# Altium PCB retroBreadboard_v1i1.PcbDoc
Units mm, origin at the board's own origin, x right, y up, seen from the top; angles counter-clockwise.
Board outline 63.5 x 58.42 mm, 4 copper layers (Component Side, Ground Plane, Power Plane, Solder Side), stack 0.844 mm thick; 80 components, 77 nets, 301 pads, 74 vias.
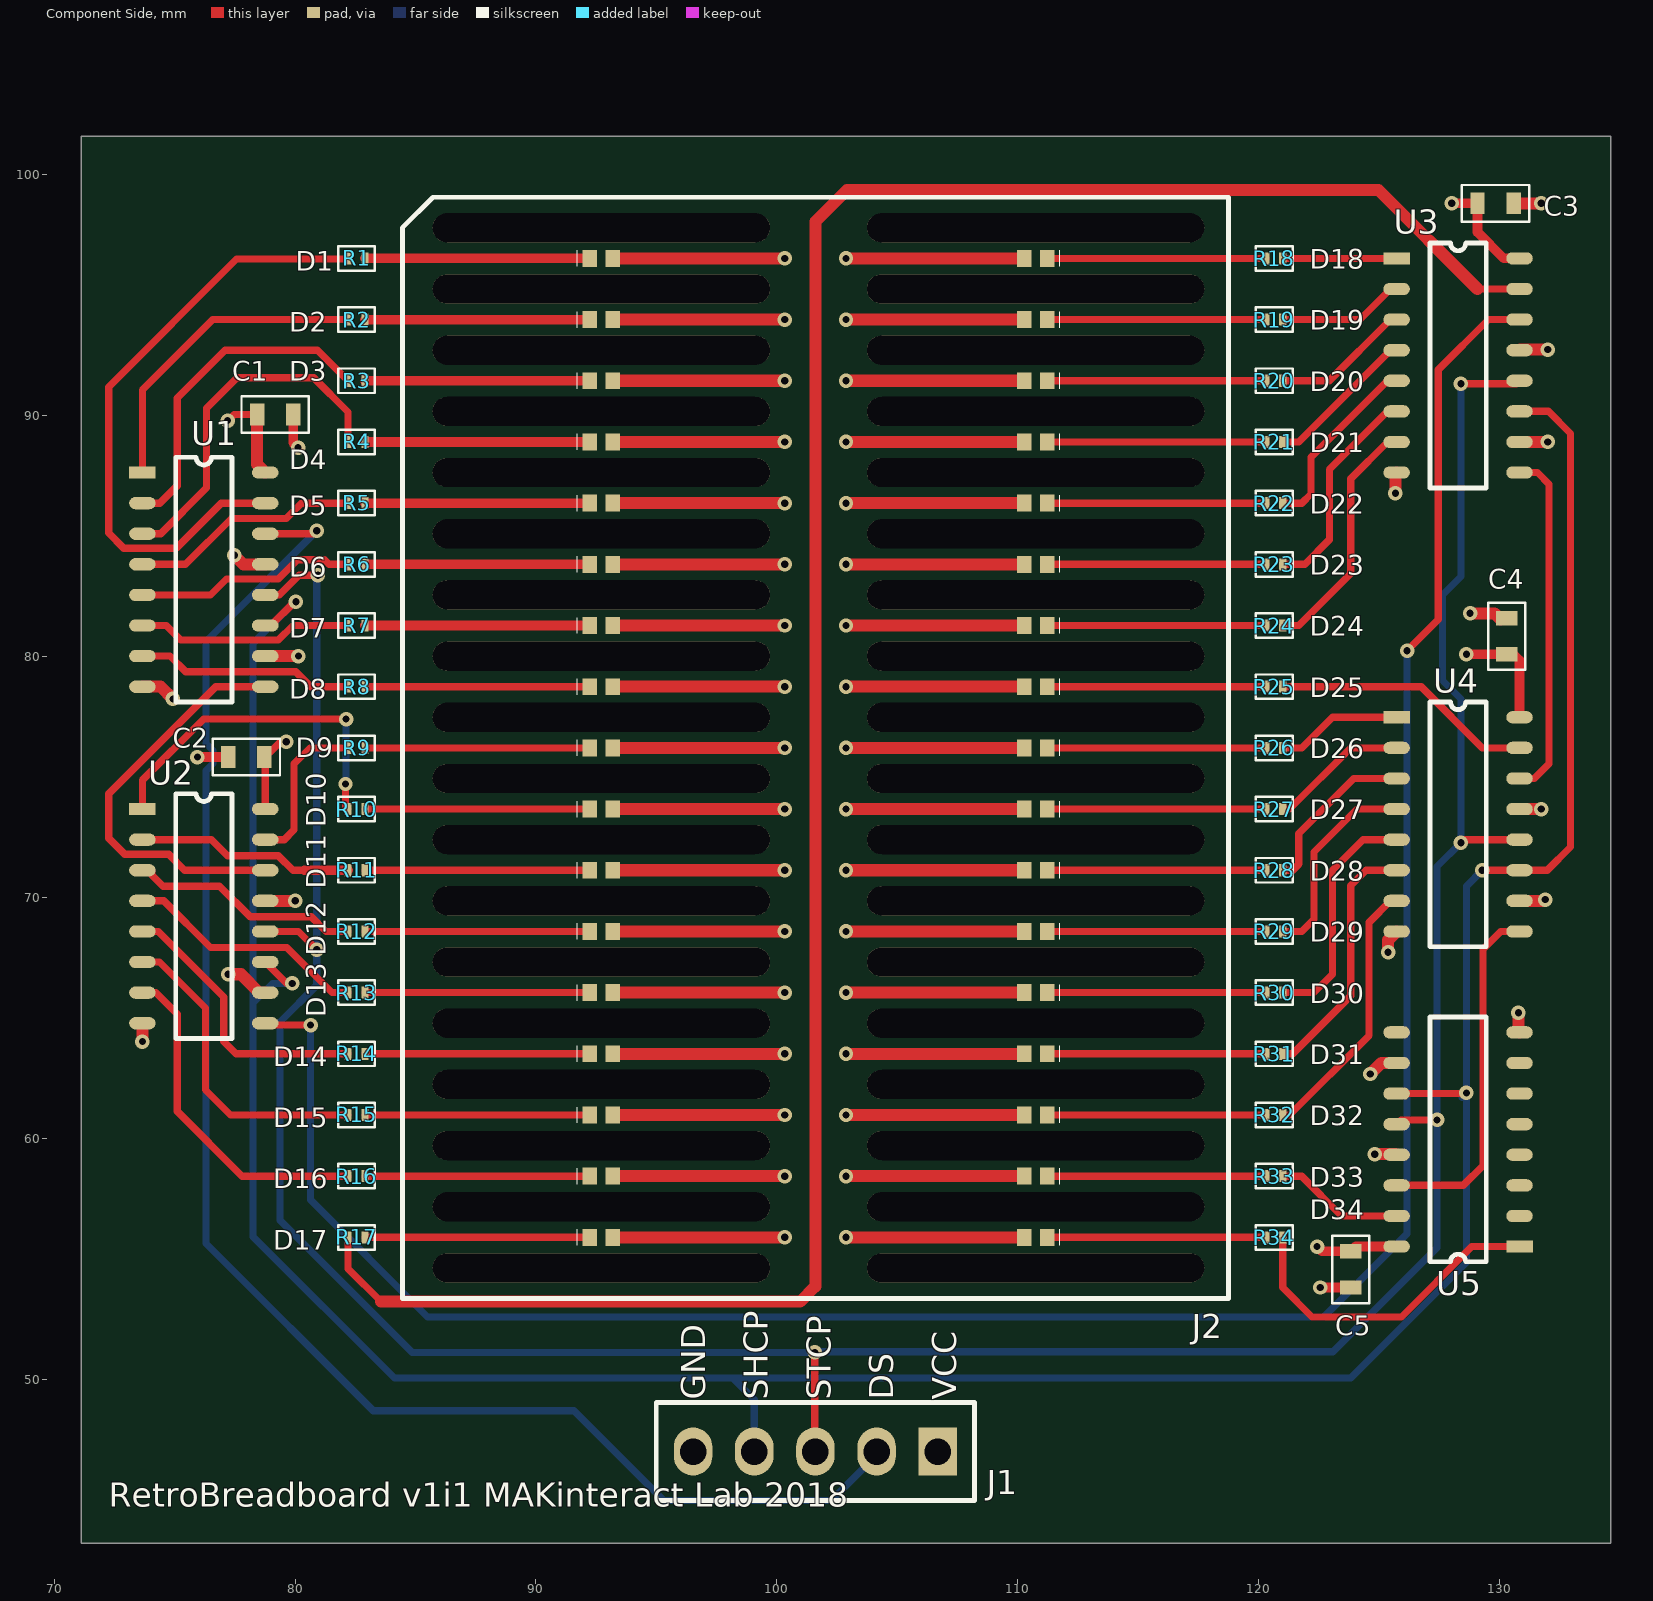
[diagram p0: Component Side view]
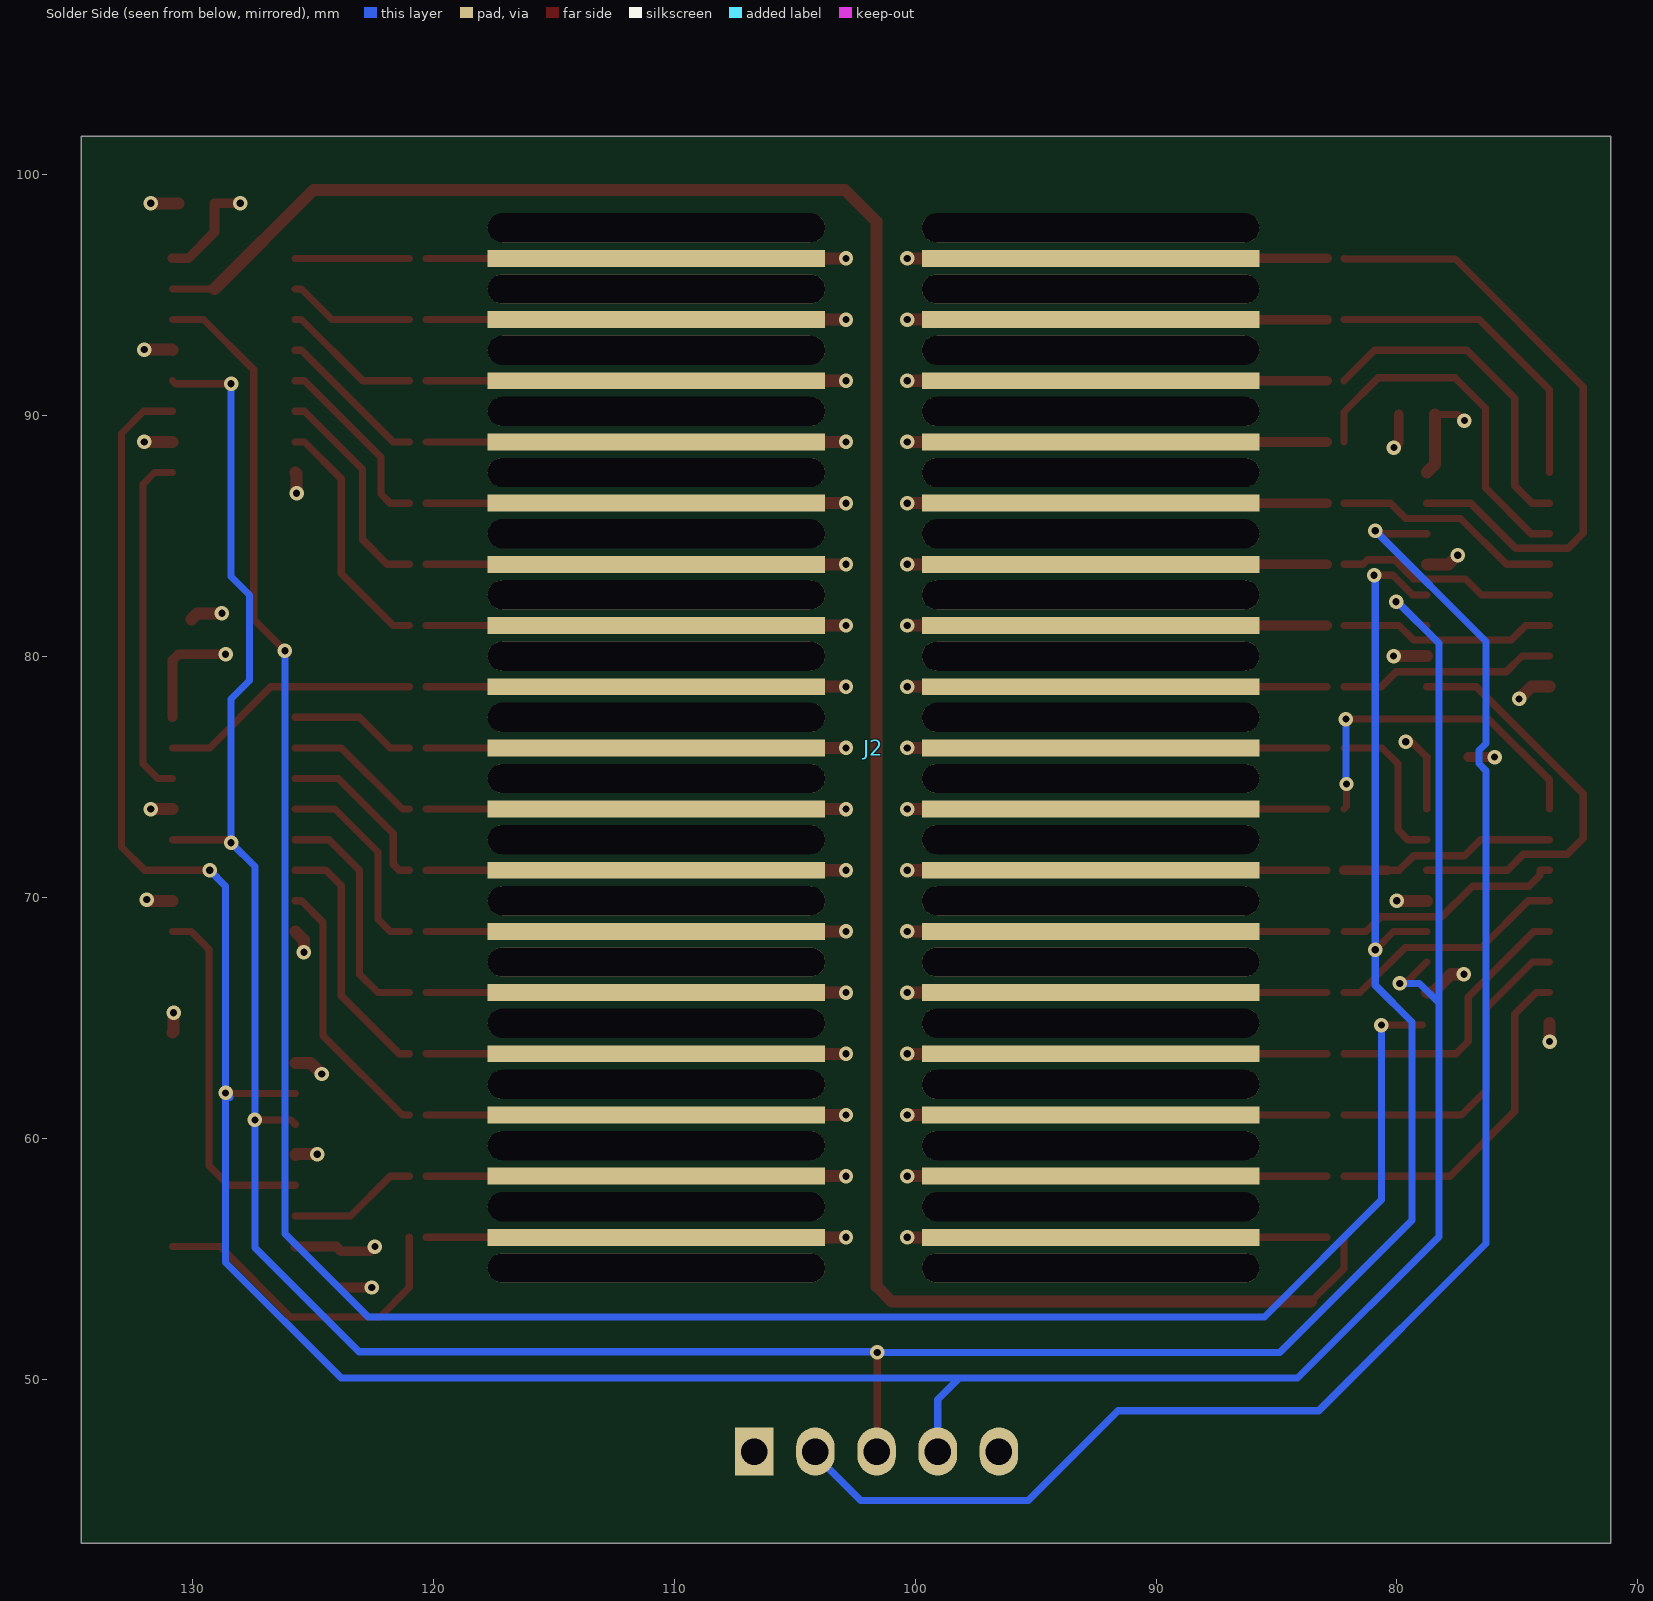
[diagram p1: Solder Side view, seen from below]
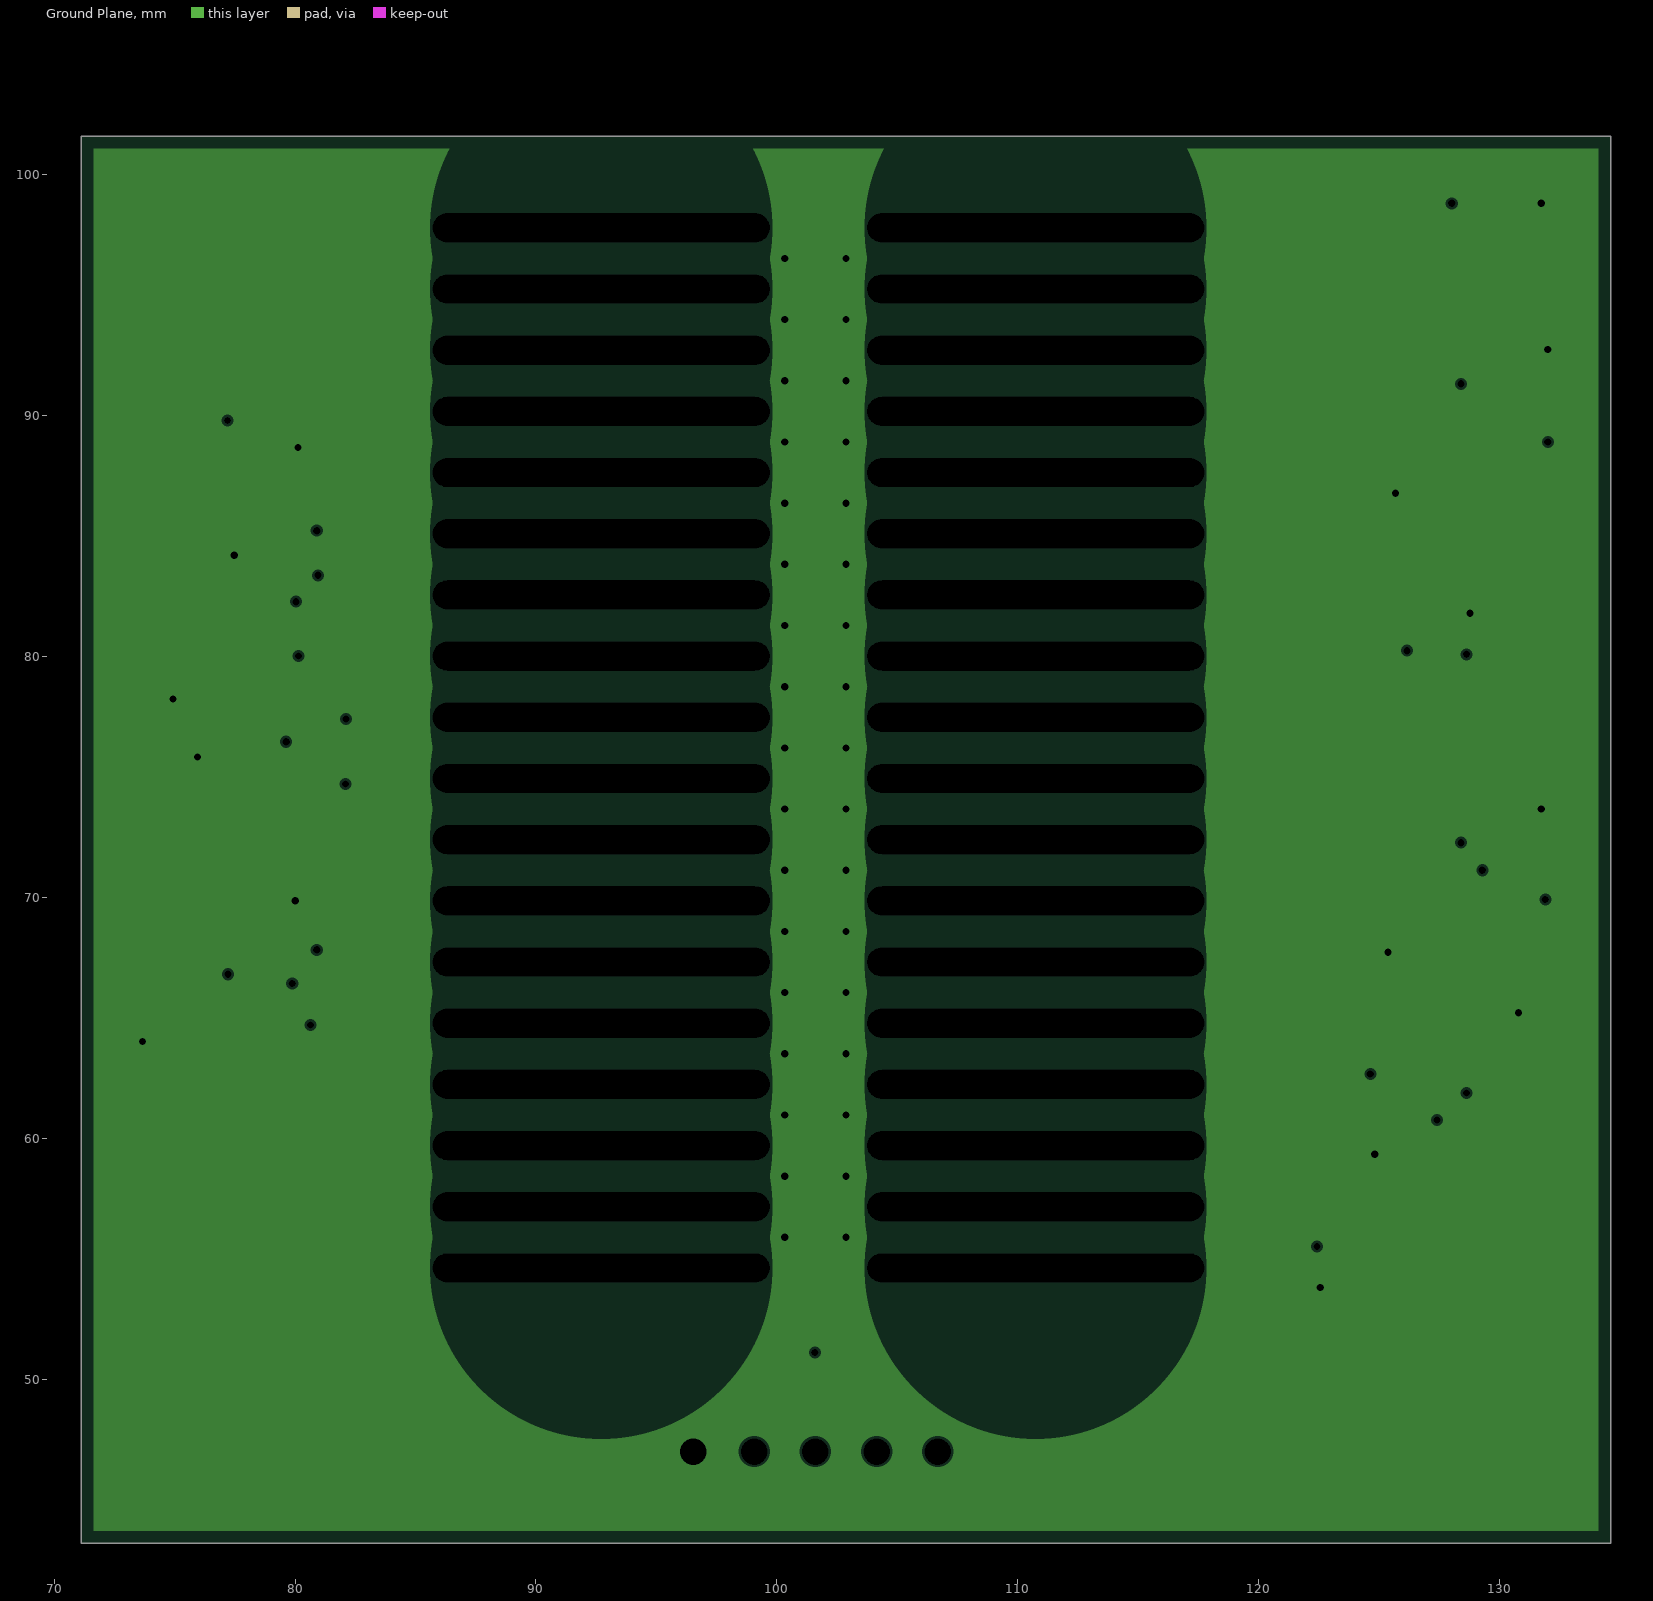
[diagram p2: Ground Plane, clearances drawn from the general rule]
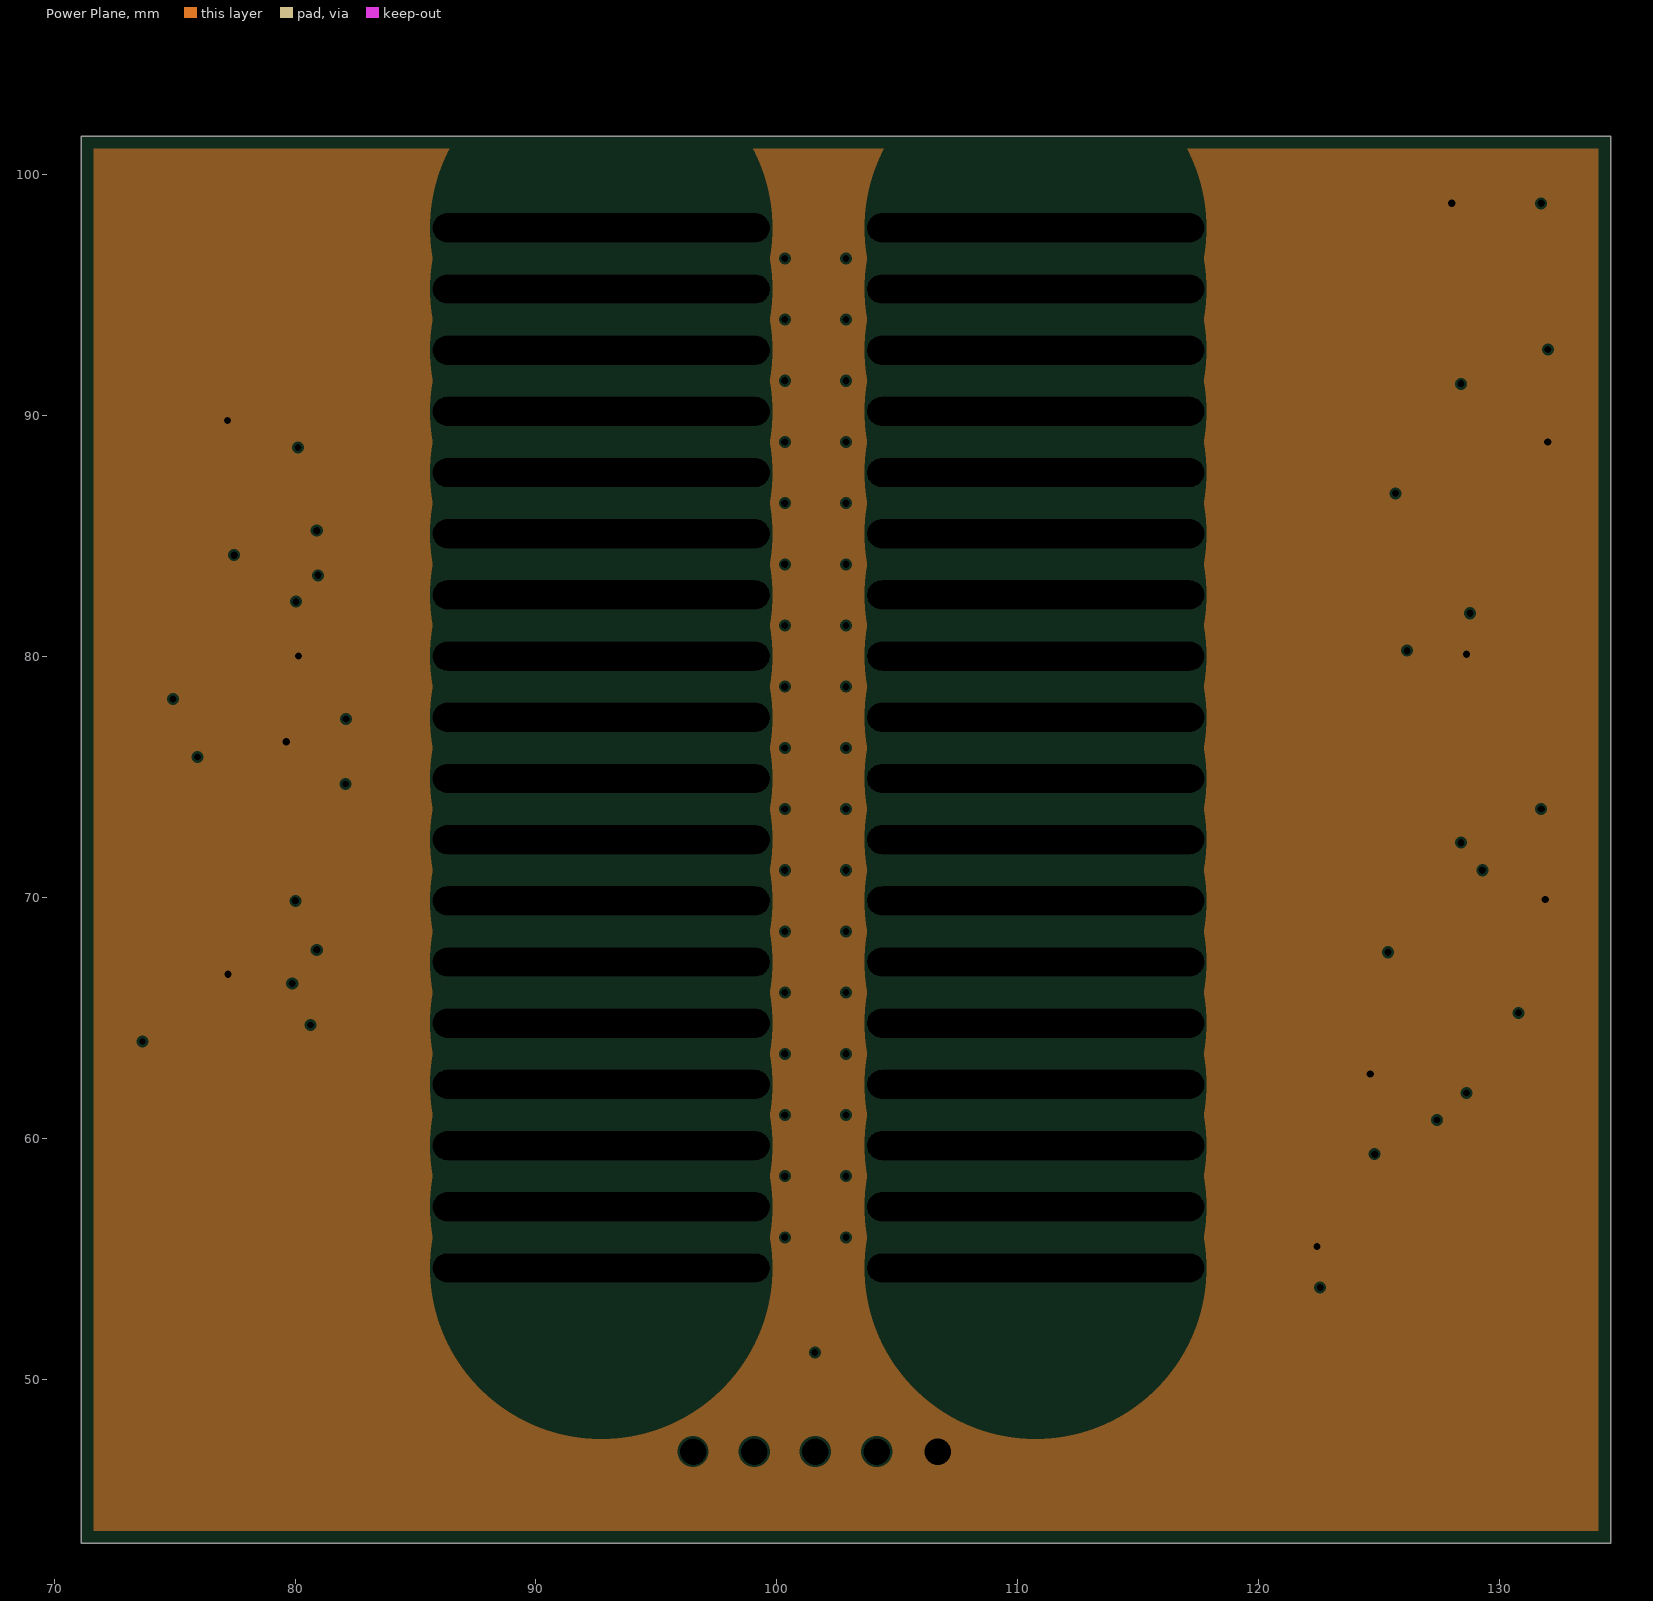
[diagram p3: Power Plane, clearances drawn from the general rule]
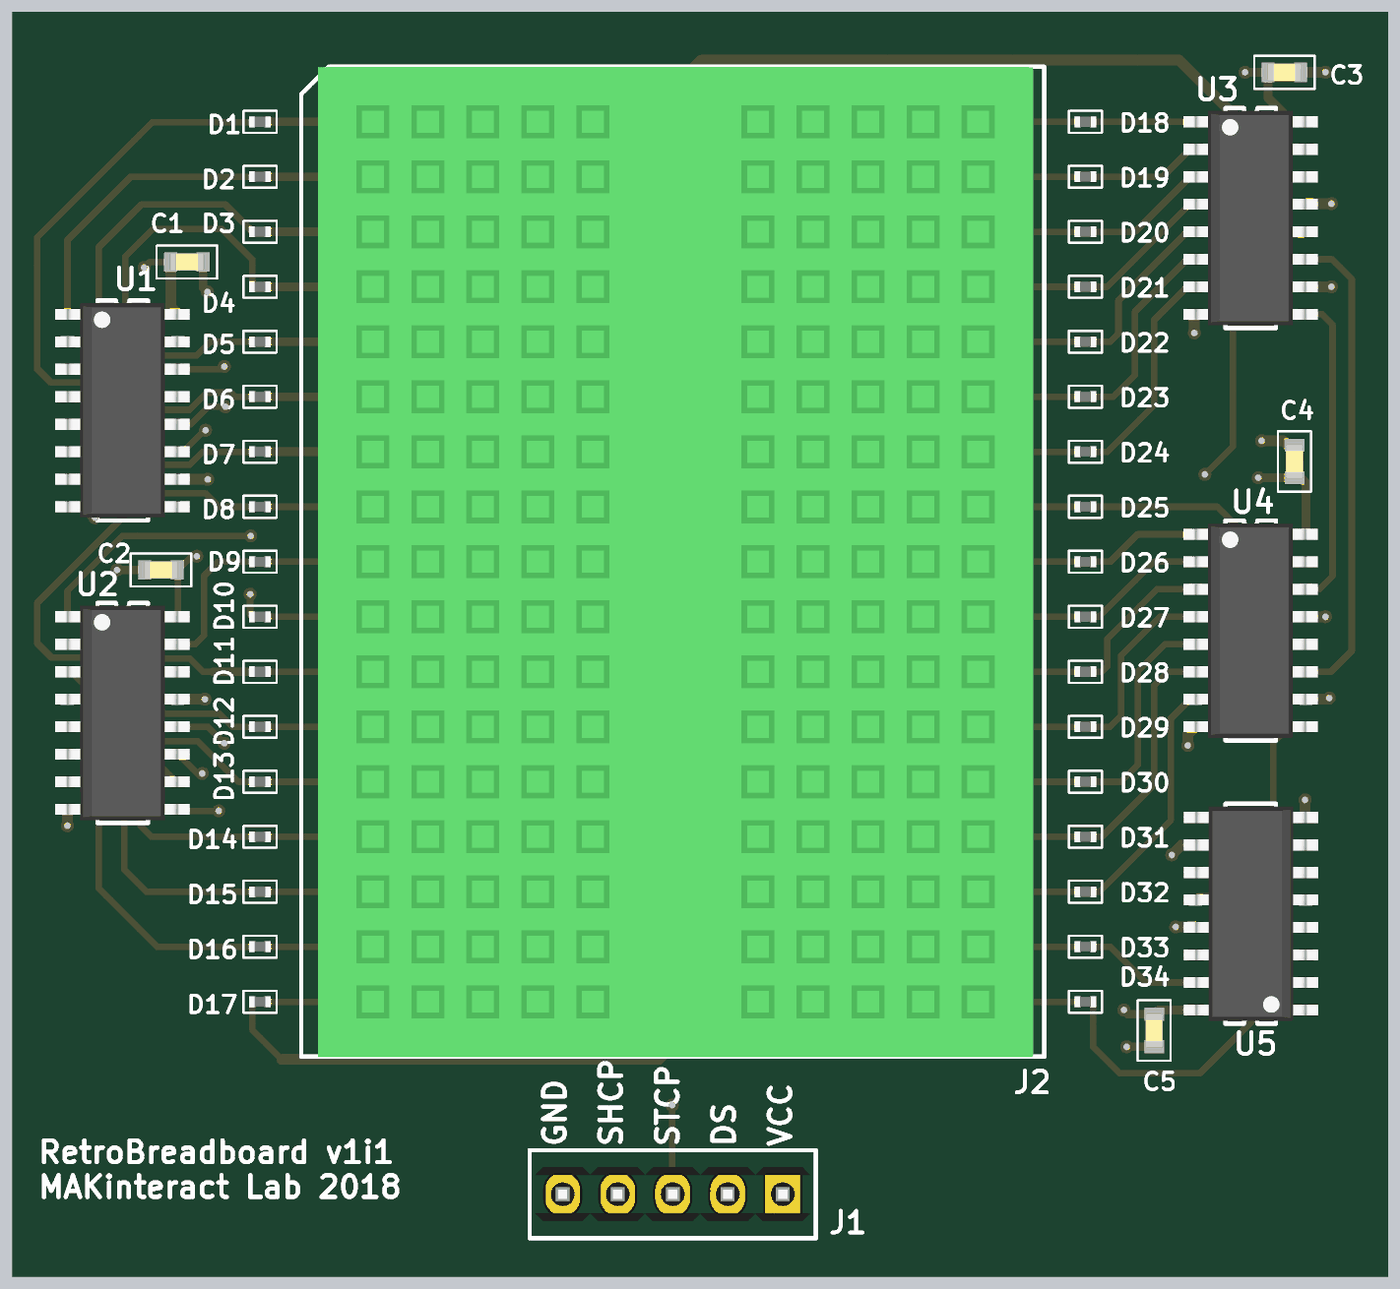
[diagram p4: 3D render of the assembled board from above, using the file's embedded part models]

## Layer stack, top to bottom
Top Solder: solder mask 0.0102, Solder Resist, Dk 3.5
Component Side: signal copper 0.0356
Dielectric 1: core 0.32, FR-4, Dk 4.8
Ground Plane: plane copper 0.036, net GND
Dielectric 3: prepreg 0.127, Dk 4.2
Power Plane: plane copper 0.036, net VCC
Dielectric 4: core 0.254, Dk 4.2
Solder Side: signal copper 0.0356
Bottom Solder: solder mask 0.0102, Solder Resist, Dk 3.5

## Board outline
71.12,101.6 134.62,101.6 134.62,43.18 71.12,43.18

## Design rules (kind name [scope] priority, off if disabled: settings)
Clearance "Around polygon" [IsRegion] p1: gap=0.3 ignorepadtopadclearanceinfootprint=FALSE
Clearance [All] p2: gap=0.2 ignorepadtopadclearanceinfootprint=FALSE
ComponentClearance [All] p1: gap=0.2 collisioncheckmode=3 verticalgap=0.2 showdistances=FALSE
HoleSize [All] p1: absolutevalues=TRUE maxlimit=14 minlimit=0.2 maxpercent=80.000 minpercent=20.000
HoleToHoleClearance [All] p1: gap=0.305 allowstackedmicrovias=TRUE
MinimumSolderMaskSliver [All] p1: minsoldermaskwidth=0.02
PlaneClearance [All] p1: clearance=0.1
PlaneConnect [All] p1: planeconnectstyle=Direct reliefexpansion=0.508 reliefentries=4 reliefconductorwidth=0.254 reliefairgap=0.254
PolygonConnect [All] p1: connectstyle=Direct reliefconductorwidth=0.254 reliefentries=4 polygonreliefangle="90 Angle" airgapwidth=0.254
RoutingVias [All] p1: holewidth=0.3 width=0.6 viastyle="Through Hole" minholewidth=0.3 minwidth=0.6 maxholewidth=0.3 maxwidth=0.6
SilkToSilkClearance [All] p1: silktosilkclearance=0.1
SilkToSolderMaskClearance [IsPad] p1: minsilkscreentomaskgap=0.1 clearancetoexposedcopper=TRUE
SolderMaskExpansion [All] p1: expansion=0.1
Width Width_POWER [InNet ('+*') or InNet('GND')] p1: maxlimit=3 minlimit=0.4 preferedwidth=0.4
Width [All] p2: maxlimit=0.5 minlimit=0.3 preferedwidth=0.4
22 further rules are at their usual default settings.

## Components (designator, comment, footprint, x,y, rotation, side; value= is the part's Value field where it differs from the comment)
C1 "10u" C1608 79.172,90.043 r0 top
C2 "10u" C1608 77.978,75.819 r180 top
C3 "10u" C1608 129.835,98.806 r0 top
C4 "10u" C1608 130.302,80.833 r90 top
C5 "10u" C1608 123.825,54.549 r270 top
D1 "VLMB1500-GS08" VLMB1500-GS08 92.71,96.52 r0 top
D2 "VLMB1500-GS08" VLMB1500-GS08 92.71,93.98 r0 top
D3 "VLMB1500-GS08" VLMB1500-GS08 92.71,91.44 r0 top
D4 "VLMB1500-GS08" VLMB1500-GS08 92.71,88.9 r0 top
D5 "VLMB1500-GS08" VLMB1500-GS08 92.71,86.36 r0 top
D6 "VLMB1500-GS08" VLMB1500-GS08 92.71,83.82 r0 top
D7 "VLMB1500-GS08" VLMB1500-GS08 92.71,81.28 r0 top
D8 "VLMB1500-GS08" VLMB1500-GS08 92.71,78.74 r0 top
D9 "VLMB1500-GS08" VLMB1500-GS08 92.71,76.2 r0 top
D10 "VLMB1500-GS08" VLMB1500-GS08 92.71,73.66 r0 top
D11 "VLMB1500-GS08" VLMB1500-GS08 92.71,71.12 r0 top
D12 "VLMB1500-GS08" VLMB1500-GS08 92.71,68.58 r0 top
D13 "VLMB1500-GS08" VLMB1500-GS08 92.71,66.04 r0 top
D14 "VLMB1500-GS08" VLMB1500-GS08 92.71,63.5 r0 top
D15 "VLMB1500-GS08" VLMB1500-GS08 92.71,60.96 r0 top
D16 "VLMB1500-GS08" VLMB1500-GS08 92.71,58.42 r0 top
D17 "VLMB1500-GS08" VLMB1500-GS08 92.71,55.88 r0 top
D18 "VLMB1500-GS08" VLMB1500-GS08 110.744,96.52 r180 top
D19 "VLMB1500-GS08" VLMB1500-GS08 110.744,93.98 r180 top
D20 "VLMB1500-GS08" VLMB1500-GS08 110.744,91.44 r180 top
D21 "VLMB1500-GS08" VLMB1500-GS08 110.744,88.9 r180 top
D22 "VLMB1500-GS08" VLMB1500-GS08 110.744,86.36 r180 top
D23 "VLMB1500-GS08" VLMB1500-GS08 110.744,83.82 r180 top
D24 "VLMB1500-GS08" VLMB1500-GS08 110.744,81.28 r180 top
D25 "VLMB1500-GS08" VLMB1500-GS08 110.744,78.74 r180 top
D26 "VLMB1500-GS08" VLMB1500-GS08 110.744,76.2 r180 top
D27 "VLMB1500-GS08" VLMB1500-GS08 110.744,73.66 r180 top
D28 "VLMB1500-GS08" VLMB1500-GS08 110.744,71.12 r180 top
D29 "VLMB1500-GS08" VLMB1500-GS08 110.744,68.58 r180 top
D30 "VLMB1500-GS08" VLMB1500-GS08 110.744,66.04 r180 top
D31 "VLMB1500-GS08" VLMB1500-GS08 110.744,63.5 r180 top
D32 "VLMB1500-GS08" VLMB1500-GS08 110.744,60.96 r180 top
D33 "VLMB1500-GS08" VLMB1500-GS08 110.744,58.42 r180 top
D34 "VLMB1500-GS08" VLMB1500-GS08 110.744,55.88 r180 top
J1 "H1x5_254" HEADER_1X5_254 106.68,46.99 r270 top
J2 "MiniBreadbaord" MINI_BREADBOARD 101.6,78.74 r0 top locked
R1 "RR0510P-101-D" RES0402 82.55,96.52 r180 top
R2 "RR0510P-101-D" RES0402 82.55,93.98 r180 top
R3 "RR0510P-101-D" RES0402 82.55,91.44 r180 top
R4 "RR0510P-101-D" RES0402 82.55,88.9 r180 top
R5 "RR0510P-101-D" RES0402 82.55,86.36 r180 top
R6 "RR0510P-101-D" RES0402 82.55,83.82 r180 top
R7 "RR0510P-101-D" RES0402 82.55,81.28 r180 top
R8 "RR0510P-101-D" RES0402 82.55,78.74 r180 top
R9 "RR0510P-101-D" RES0402 82.55,76.2 r180 top
R10 "RR0510P-101-D" RES0402 82.55,73.66 r180 top
R11 "RR0510P-101-D" RES0402 82.55,71.12 r180 top
R12 "RR0510P-101-D" RES0402 82.55,68.58 r180 top
R13 "RR0510P-101-D" RES0402 82.55,66.04 r180 top
R14 "RR0510P-101-D" RES0402 82.55,63.5 r180 top
R15 "RR0510P-101-D" RES0402 82.55,60.96 r180 top
R16 "RR0510P-101-D" RES0402 82.55,58.42 r180 top
R17 "RR0510P-101-D" RES0402 82.55,55.88 r180 top
R18 "RR0510P-101-D" RES0402 120.65,96.52 r0 top
R19 "RR0510P-101-D" RES0402 120.65,93.98 r0 top
R20 "RR0510P-101-D" RES0402 120.65,91.44 r0 top
R21 "RR0510P-101-D" RES0402 120.65,88.9 r0 top
R22 "RR0510P-101-D" RES0402 120.65,86.36 r0 top
R23 "RR0510P-101-D" RES0402 120.65,83.82 r0 top
R24 "RR0510P-101-D" RES0402 120.65,81.28 r0 top
R25 "RR0510P-101-D" RES0402 120.65,78.74 r0 top
R26 "RR0510P-101-D" RES0402 120.65,76.2 r0 top
R27 "RR0510P-101-D" RES0402 120.65,73.66 r0 top
R28 "RR0510P-101-D" RES0402 120.65,71.12 r0 top
R29 "RR0510P-101-D" RES0402 120.65,68.58 r0 top
R30 "RR0510P-101-D" RES0402 120.65,66.04 r0 top
R31 "RR0510P-101-D" RES0402 120.65,63.5 r0 top
R32 "RR0510P-101-D" RES0402 120.65,60.96 r0 top
R33 "RR0510P-101-D" RES0402 120.65,58.42 r0 top
R34 "RR0510P-101-D" RES0402 120.65,55.88 r0 top
U1 "SN74HC595DR" SOIC16 73.66,87.63 r0 top
U2 "SN74HC595DR" SOIC16 73.66,73.66 r0 top
U3 "SN74HC595DR" SOIC16 125.73,96.52 r0 top
U4 "SN74HC595DR" SOIC16 125.73,77.47 r0 top
U5 "SN74HC595DR" SOIC16 130.83,55.499 r180 top

## Footprints (in the part's own frame and the unit in brackets; to place one, negate y for a bottom-side part, rotate by r counter-clockwise, add the part's x,y. Pads: shape width x height; smd on the part's side, far side on the other; paste and mask are expansions set on the pad)
C1608 [mm]
  rect 0.6x0.9 smd mask+0.02: 1(-0.75,0) 2(0.75,0)
  silkscreen extent -1.4,-0.76 1.4,0.76, body extent -0.8,-0.41 0.8,0.41, height 0.57
HEADER_1X5_254 [mm]
  rect 2x1.6 hole 1.1: 1(0,0)
  oval 2x1.6 hole 1.1: 2(0,-2.54) 3(0,-5.08) 4(0,-7.62) 5(0,-10.16)
  silkscreen extent -2.03,-11.68 2.03,1.52, body extent -1.25,-11.43 1.25,1.27, height 3.1
MINI_BREADBOARD [mm]
  rect 14x0.7 smd far side mask+0.05: 1(-8.89,17.78) 2(-8.89,15.24) 3(-8.89,12.7) 4(-8.89,10.16) 5(-8.89,7.62) 6(-8.89,5.08) 7(-8.89,2.54) 8(-8.89,0) 9(-8.89,-2.54) 10(-8.89,-5.08) 11(-8.89,-7.62) 12(-8.89,-10.16) 13(-8.89,-12.7) 14(-8.89,-15.24) 15(-8.89,-17.78) 16(-8.89,-20.32) 17(-8.89,-22.86) 18(9.144,17.78) 19(9.144,15.24) 20(9.144,12.7) 21(9.144,10.16) 22(9.144,7.62) 23(9.144,5.08) 24(9.144,2.54) 25(9.144,0) 26(9.144,-2.54) 27(9.144,-5.08) 28(9.144,-7.62) 29(9.144,-10.16) 30(9.144,-12.7) 31(9.144,-15.24) 32(9.144,-17.78) 33(9.144,-20.32) 34(9.144,-22.86)
  rrect100% 14x1.2 hole 1.2 slot 14 at 0 deg unplated: ""(-8.89,-24.13) ""(-8.89,-21.59) ""(-8.89,-19.05) ""(-8.89,-16.51) ""(-8.89,-13.97) ""(-8.89,-11.43) ""(-8.89,-8.89) ""(-8.89,-6.35) ""(-8.89,-3.81) ""(-8.89,-1.27) ""(-8.89,1.27) ""(-8.89,3.81) ""(-8.89,6.35) ""(-8.89,8.89) ""(-8.89,11.43) ""(-8.89,13.97) ""(-8.89,16.51) ""(-8.89,19.05) ""(9.144,-24.13) ""(9.144,-21.59) ""(9.144,-19.05) ""(9.144,-16.51) ""(9.144,-13.97) ""(9.144,-11.43) ""(9.144,-8.89) ""(9.144,-6.35) ""(9.144,-3.81) ""(9.144,-1.27) ""(9.144,1.27) ""(9.144,3.81) ""(9.144,6.35) ""(9.144,8.89) ""(9.144,11.43) ""(9.144,13.97) ""(9.144,16.51) ""(9.144,19.05)
  silkscreen extent -17.14,-25.4 17.15,20.32, body extent -16.38,-25.4 16.64,20.32, height 9.54
RES0402 [mm]
  rect 0.3x0.5 smd mask+0.02: 1(-0.35,0) 2(0.35,0)
  silkscreen extent -0.76,-0.51 0.76,0.51, body extent -0.5,-0.25 0.5,0.25, height 0.25
SOIC16 [mm]
  rect 1.1x0.51 smd mask+0.02: 1(0,0)
  oval 1.1x0.51 smd mask+0.02: 2(0,-1.27) 3(0,-2.54) 4(0,-3.81) 5(0,-5.08) 6(0,-6.35) 7(0,-7.62) 8(0,-8.89) 9(5.1,-8.89) 10(5.1,-7.62) 11(5.1,-6.35) 12(5.1,-5.08) 13(5.1,-3.81) 14(5.1,-2.54) 15(5.1,-1.27) 16(5.1,0)
  silkscreen extent 1.38,-9.53 3.72,0.64, body extent -0.56,-9.4 5.64,0.51, height 1.71
VLMB1500-GS08 [mm]
  rect 0.6x0.7 smd mask+0.02: 1(-0.475,0) 2(0.475,0)
  silkscreen extent -0.99,-0.33 -0.99,0.33, body extent -0.5,-0.25 0.51,0.25, height 0.45

## Part data
C1 C2 C3 C4 C5: library part C805_10u
D1 D2 D3 D4 D5 D6 D7 D8 D9 D10 D11 D12 D13 D14 D15 D16 D17 D18 D19 D20 D21 D22 D23 D24 D25 D26 D27 D28 D29 D30 D31 D32 D33 D34: "Standard LEDs - SMD 0402 BLUE Non-Diff", Case/Package=0402, Case Code (Metric)=1005, Colour=Blue, Forward Current=30mA, Forward Voltage=3.15V, Lens Colour=Clear, Manufacturer=Vishay, Max Operating Temperature=80°C, Max Power Dissipation=76mW, Min Operating Temperature=-30°C, Package Quantity=1, Power Rating=75mW, Supplier Part Number 1=VLMB1500-GS08DKR-ND, Test Current=5mA, Case Code (Imperial)=0402, ComponentLink1Description=http://www.vishay.com/docs/82554/vlmo1500.pdf, ComponentLink1URL=http://www.vishay.com/docs/82554/vlmo1500.pdf, Contact Plating=Matte,Tin, Depth=0.5mm, Dominant Wavelength=470nm, Height=0.35mm, Illumination Colour=Blue, Lead Free="Lead Free", Length=1mm, Lens Style=Rectangular, Luminous Intensity=45mcd, Manufacturer Part Number=VLMB1500-GS08, Mount="Surface Mount", Number of Elements=1, Number of LEDs=1, Number of Pins=2, Packaging="Tape and Reel", Power Dissipation=76mW, Pricing 1="1=0.41, 10=0.292, 25=0.2532, 100=0.1949, 250=0.15836, 500=0.11696, 1000=0.09746 (USD)", Radiation Hardening=No, REACH SVHC=Unknown, Stock 1=322508, Supplier 1=Digi-Key, Viewing Angle=130°, Width=0.5mm
J1: "CONN HEADER 5POS .100 VERT GOLD", Colour=White, Contact Resistance=10mR, Current Rating=4A, Flammability Rating="UL94 V-0", Insulation Resistance=50GR, Manufacturer=Molex, Manufacturer Part Number=22-10-2051, Max Operating Temperature=75°C, Min Operating Temperature=0°C, Package Quantity=10, Supplier Part Number 1=WM2725-ND, Voltage Rating=250V, ComponentLink1Description=http://www.mouser.com/ds/2/276/0022102051_PCB_HEADERS-158417.pdf, ComponentLink1URL=http://www.mouser.com/ds/2/276/0022102051_PCB_HEADERS-158417.pdf, ComponentLink2Description=http://www.jameco.com/Jameco/Products/ProdDS/878921.pdf, ComponentLink2URL=http://www.jameco.com/Jameco/Products/ProdDS/878921.pdf, ComponentLink3Description=https://www.molex.com/pdm_docs/ps/PS-10-07-001.pdf, ComponentLink3URL=https://www.molex.com/pdm_docs/ps/PS-10-07-001.pdf, Connector Type="Male Pin", Contact Gender=Male, Contact Material=Brass, Contact Mating Length=0.295inch, Contact Plating=Gold, Depth=6.35mm, Gender=Male, Glow Wire Compliant=Non-compliant, Halogen Free="Low Halogen", Height=10.67mm, Housing Colour=White, Housing Material=Nylon, Length=35.56mm, Max Current Rating=4A, Mount="Through Hole", Number of Circuits=5, Number of Contacts=5, Number of Positions=5, Number of Rows=1, Orientation=Straight, Packaging=Bulk, Pitch=2.54mm, Pricing 1="1=0.99, 10=0.867, 100=0.748, 500=0.612, 1000=0.544, 5000=0.476, 10000=0.4522 (USD)", Radiation Hardening=No, REACH SVHC="No SVHC", Stock 1=6544, Supplier 1=Digi-Key, Termination=Solder, Voltage Rating (DC)=250V
J2: library part 1738132-1, "Mini Breadboard", Colour=Natural, Manufacturer="TE Connectivity AMP", Supplier Part Number 1=1738132-1-ND, ComponentLink1Description=http://www.te.com/commerce/DocumentDelivery/DDEController?Action=srchrtrv&DocNm=1738132&DocType=Customer+Drawing&DocLang=English, ComponentLink1URL=http://www.te.com/commerce/DocumentDelivery/DDEController?Action=srchrtrv&DocNm=1738132&DocType=Customer+Drawing&DocLang=English, Gender=Male, Manufacturer Part Number=1738132-1, Stock 1=0, Supplier 1=Digi-Key
R1 R2 R3 R4 R5 R6 R7 R8 R9 R10 R11 R12 R13 R14 R15 R16 R17 R18 R19 R20 R21 R22 R23 R24 R25 R26 R27 R28 R29 R30 R31 R32 R33 R34: "RES SMD 100 OHM 0.5% 1/16W 0402", Case/Package=0402, Case Code (Metric)=1005, Manufacturer=Susumu, Max Operating Temperature=125°C, Max Power Dissipation=63mW, Min Operating Temperature=-55°C, Package Quantity=1, Resistance=100R, Supplier Part Number 1=RR05P100DDKR-ND, Temperature Coefficient=25ppm/°C, Tolerance=0.5%, Voltage Rating=25V, Case Code (Imperial)=0402, ComponentLink1Description=http://www.susumu.co.jp/common/pdf/n_catalog_partition05_en.pdf, ComponentLink1URL=http://www.susumu.co.jp/common/pdf/n_catalog_partition05_en.pdf, ComponentLink2Description=http://www.farnell.com/datasheets/1581132.pdf, ComponentLink2URL=http://www.farnell.com/datasheets/1581132.pdf, Composition="Thin Film", Height=0.016inch, Lead Free="Lead Free", Length=0.039inch, Manufacturer Part Number=RR0510P-101-D, Number of Pins=2, Number of Terminations=2, Packaging="Tape and Reel", Power Rating=63mW, Pricing 1="1=0.1, 10=0.074, 100=0.0285, 1000=0.01254, 2500=0.01083, 5000=0.00969 (USD)", REACH SVHC=Unknown, Stock 1=596223, Supplier 1=Digi-Key, Termination=SMD/SMT, Voltage Rating (DC)=25V, Width=0.02inch
U1 U2 U3 U4 U5: library part 74HC595, "IC, SM, LOGIC, 74HC, REGISTER", Case/Package=SOIC, Frequency=42MHz, Manufacturer="Texas Instruments", Max Input Current=1uA, Max Operating Temperature=85°C, Max Supply Voltage=6V, Min Operating Temperature=-40°C, Min Supply Voltage=2V, Operating Supply Voltage=5V, Package Quantity=2500, Quiescent Current=8uA, Supplier Part Number 1=296-14857-6-ND, ComponentLink1Description=http://www.ti.com/lit/ds/symlink/sn74hc595.pdf, ComponentLink1URL=http://www.ti.com/lit/ds/symlink/sn74hc595.pdf, ComponentLink2Description=http://www.farnell.com/datasheets/1831198.pdf, ComponentLink2URL=http://www.farnell.com/datasheets/1831198.pdf, ComponentLink3Description=http://www.farnell.com/datasheets/1886142.pdf, ComponentLink3URL=http://www.farnell.com/datasheets/1886142.pdf, ComponentLink4Description=https://www.verical.com/server-webapp/html/getDatasheet?partID=134875, ComponentLink4URL=https://www.verical.com/server-webapp/html/getDatasheet?partID=134875, ComponentLink5Description=http://www.farnell.com/datasheets/1905810.pdf, ComponentLink5URL=http://www.farnell.com/datasheets/1905810.pdf, ComponentLink6Description=http://www.ti.com/general/docs/lit/getliterature.tsp?genericPartNumber=SN54HC595-SP&&fileType=pdf, ComponentLink6URL=http://www.ti.com/general/docs/lit/getliterature.tsp?genericPartNumber=SN54HC595-SP&&fileType=pdf, ComponentLink7Description=http://www.jameco.com/Jameco/Products/ProdDS/916385.pdf, ComponentLink7URL=http://www.jameco.com/Jameco/Products/ProdDS/916385.pdf, ComponentLink8Description=http://www.farnell.com/datasheets/2020588.pdf, ComponentLink8URL=http://www.farnell.com/datasheets/2020588.pdf, ComponentLink9Description=http://datasheet.iiic.cc/texas_instruments/SN74HC595DR.pdf, ComponentLink9URL=http://datasheet.iiic.cc/texas_instruments/SN74HC595DR.pdf, Contact Plating=Gold, Direction=Unidirectional, Height=1.58mm, Lead Free="Lead Free", Length=9.9mm, Logic Function="Shift Register", Manufacturer Part Number=SN74HC595DR, Mount="Surface Mount", Number of Bits=8, Number of Bits per Element=8, Number of Circuits=4, Number of Elements=1, Number of Output Lines=10, Number of Pins=16, Packaging="Tape and Reel", Pricing 1="1=0.51, 10=0.433, 100=0.323, 500=0.2538, 1000=0.19611 (USD)", Propagation Delay=250ns, Radiation Hardening=No, REACH SVHC="No SVHC", Stock 1=53061, Supplier 1=Digi-Key, Termination=SMD/SMT, Turn-On Delay Time=250ns, Weight=0.004998oz, Width=3.91mm

## Via types
v1: diameter 0.6, hole 0.3, Component Side to Solder Side, tented both sides, 72 vias
v2: diameter 0.6/0.6 (per signal layer), hole 0.3, Component Side to Solder Side, tented both sides, 2 vias

## Nets (pads, with @x,y where several pads share a name; then routed paths per layer and width w, separated by ;. In a path a pad name is that pad's centre, name@x,y a point inside that pad or via, vN(x,y) a via of type N, cw(c..) or ccw(c..) an arc to the next point about the centre after c; other vN are vias at no path point)
DS: J1.2 U1.14 | length 67.1
  Component Side w0.3: U1.14 80.772,85.09 v1(80.899,85.217)
  Solder Side w0.3: v1(80.899,85.217) 76.302,80.62 76.302,76.383 76.596,76.088 76.596,75.55 76.302,75.255 76.302,55.626 83.248,48.679 91.58,48.679 95.301,44.958 102.26,44.958 104.14,46.838 J1.2
GND: C1.2 C2.2 C3.2 C4.2 C5.2 D1.2 D2.2 D3.2 D4.2 D5.2 D6.2 D7.2 D8.2 D9.2 D10.2 D11.2 D12.2 D13.2 D14.2 D15.2 D16.2 D17.2 D18.2 D19.2 D20.2 D21.2 D22.2 D23.2 D24.2 D25.2 D26.2 D27.2 D28.2 D29.2 D30.2 D31.2 D32.2 D33.2 D34.2 J1.5 U1.8 U1.13 U2.8 U2.13 U3.8 U3.13 U4.8 U4.13 U5.8 U5.13 | length 264.3
  Component Side w0.4: v1(75.946,75.819) C2.2@77.028,75.819 ; C1.2 79.922,88.864 v2(80.122,88.664) ; v1(122.555,53.799) C5.2
  Component Side w0.5: v1(73.66,64.008) U2.8 ; U1.8 74.422,78.74 v1(74.93,78.232) ; v1(77.47,84.201) 77.851,83.82 U1.13 ; U2.13 v1(80.01,69.85) ; D17.2 v1(100.33,55.88) ; D16.2 v1(100.33,58.42) ; D15.2 v1(100.33,60.96) ; D14.2 v1(100.33,63.5) ; D13.2 v1(100.33,66.04) ; D12.2 v1(100.33,68.58) ; D11.2 v1(100.33,71.12) ; D10.2 v1(100.33,73.66) ; D9.2 v1(100.33,76.2) ; D8.2 v1(100.33,78.74) ; D7.2 v1(100.33,81.28) ; D6.2 v1(100.33,83.82) ; D5.2 v1(100.33,86.36) ; D4.2 v1(100.33,88.9) ; D3.2 v1(100.33,91.44) ; D2.2 v1(100.33,93.98) ; D1.2 v2(100.33,96.52) ; v1(102.87,55.88) D34.2 ; v1(102.87,58.42) D33.2 ; v1(102.87,60.96) D32.2 ; v1(102.87,63.5) D31.2 ; v1(102.87,66.04) D30.2 ; v1(102.87,68.58) D29.2 ; v1(102.87,71.12) D28.2 ; v1(102.87,73.66) D27.2 ; v1(102.87,76.2) D26.2 ; v1(102.87,78.74) D25.2 ; v1(102.87,81.28) D24.2 ; v1(102.87,83.82) D23.2 ; v1(102.87,86.36) D22.2 ; v1(102.87,88.9) D21.2 ; v1(102.87,91.44) D20.2 ; v1(102.87,93.98) D19.2 ; v1(102.87,96.52) D18.2 ; v1(124.816,59.334) 125.705,59.334 U5.13 ; v1(125.374,67.716) 125.374,68.224 U4.8 ; v1(125.679,86.766) 125.679,87.579 U3.8 ; v1(128.778,81.788) 128.783,81.783 129.794,81.783 C4.2@130.048,81.529 ; C3.2 v1(131.73,98.806) ; v1(130.785,65.202) 130.785,64.434 U5.8 ; U4.13 v1(131.73,73.66) ; U3.13 130.855,92.735 v1(132.004,92.735)
NetD1_1: D1.1 R1.1 | length 9.3
  Component Side w0.4: R1.1 D1.1
NetD2_1: D2.1 R2.1 | length 9.3
  Component Side w0.4: R2.1 D2.1
NetD3_1: D3.1 R3.1 | length 9.3
  Component Side w0.4: R3.1 D3.1
NetD4_1: D4.1 R4.1 | length 9.3
  Component Side w0.4: R4.1 D4.1
NetD5_1: D5.1 R5.1 | length 9.3
  Component Side w0.4: R5.1 D5.1
NetD6_1: D6.1 R6.1 | length 9.3
  Component Side w0.4: R6.1 D6.1
NetD7_1: D7.1 R7.1 | length 9.3
  Component Side w0.4: R7.1 D7.1
NetD8_1: D8.1 R8.1 | length 9.3
  Component Side w0.3: R8.1 D8.1
NetD9_1: D9.1 R9.1 | length 9.3
  Component Side w0.3: R9.1 D9.1
NetD10_1: D10.1 R10.1 | length 9.3
  Component Side w0.3: R10.1 D10.1
NetD11_1: D11.1 R11.1 | length 9.3
  Component Side w0.3: R11.1 D11.1
NetD12_1: D12.1 R12.1 | length 9.3
  Component Side w0.3: R12.1 D12.1
NetD13_1: D13.1 R13.1 | length 9.3
  Component Side w0.3: R13.1 D13.1
NetD14_1: D14.1 R14.1 | length 9.3
  Component Side w0.3: R14.1 D14.1
NetD15_1: D15.1 R15.1 | length 9.3
  Component Side w0.3: R15.1 D15.1
NetD16_1: D16.1 R16.1 | length 9.3
  Component Side w0.3: R16.1 D16.1
NetD17_1: D17.1 R17.1 | length 9.3
  Component Side w0.3: R17.1 D17.1
NetD18_1: D18.1 R18.1 | length 9.1
  Component Side w0.3: D18.1 R18.1
NetD19_1: D19.1 R19.1 | length 9.1
  Component Side w0.3: D19.1 R19.1
NetD20_1: D20.1 R20.1 | length 9.1
  Component Side w0.3: D20.1 R20.1
NetD21_1: D21.1 R21.1 | length 9.1
  Component Side w0.3: D21.1 R21.1
NetD22_1: D22.1 R22.1 | length 9.1
  Component Side w0.3: D22.1 R22.1
NetD23_1: D23.1 R23.1 | length 9.1
  Component Side w0.3: D23.1 R23.1
NetD24_1: D24.1 R24.1 | length 9.1
  Component Side w0.3: D24.1 R24.1
NetD25_1: D25.1 R25.1 | length 9.1
  Component Side w0.3: D25.1 R25.1
NetD26_1: D26.1 R26.1 | length 9.1
  Component Side w0.3: D26.1 R26.1
NetD27_1: D27.1 R27.1 | length 9.1
  Component Side w0.3: D27.1 R27.1
NetD28_1: D28.1 R28.1 | length 9.1
  Component Side w0.3: D28.1 R28.1
NetD29_1: D29.1 R29.1 | length 9.1
  Component Side w0.3: D29.1 R29.1
NetD30_1: D30.1 R30.1 | length 9.1
  Component Side w0.3: D30.1 R30.1
NetD31_1: D31.1 R31.1 | length 9.1
  Component Side w0.3: D31.1 R31.1
NetD32_1: D32.1 R32.1 | length 9.1
  Component Side w0.3: D32.1 R32.1
NetD33_1: D33.1 R33.1 | length 9.1
  Component Side w0.3: D33.1 R33.1
NetD34_1: D34.1 R34.1 | length 9.1
  Component Side w0.3: D34.1 R34.1
NetR1_2: R1.2 U1.15 | length 25.8
  Component Side w0.3: U1.15 76.937,86.36 75.062,84.485 72.89,84.485 72.26,85.115 72.26,91.183 77.572,96.495 82.175,96.495 R1.2
NetR2_2: R2.2 U1.1 | length 13.2
  Component Side w0.3: U1.1 73.66,91.059 76.581,93.98 R2.2
NetR3_2: R3.2 U1.2 | length 13.8
  Component Side w0.3: U1.2 74.386,86.36 75.108,87.082 75.108,90.729 77.089,92.71 80.93,92.71 R3.2
NetR4_2: R4.2 U1.3 | length 15
  Component Side w0.3: U1.3 74.422,85.09 76.327,86.995 76.327,90.302 77.576,91.551 77.581,91.551 77.597,91.567 80.772,91.567 82.2,90.139 R4.2
NetR5_2: R5.2 U1.4 | length 9.6
  Component Side w0.3: U1.4 75.455,83.82 77.36,85.725 79.629,85.725 80.264,86.36 R5.2
NetR6_2: R6.2 U1.5 | length 9.2
  Component Side w0.3: U1.5 76.484,82.55 77.149,83.215 79.306,83.215 80.103,84.013 81.219,84.013 81.412,83.82 R6.2
NetR7_2: R7.2 U1.6 | length 9
  Component Side w0.3: U1.6 74.651,81.28 75.256,80.675 79.306,80.675 79.911,81.28 R7.2
NetR8_2: R8.2 U1.7 | length 9.1
  Component Side w0.3: U1.7 74.811,80.01 75.461,79.36 80.025,79.36 80.645,78.74 R8.2
NetR9_2: R9.2 U2.15 | length 6.6
  Component Side w0.3: U2.15 79.553,72.39 79.959,72.796 79.959,75.54 80.62,76.2 R9.2
NetR10_2: R10.2 U2.1 | length 14.5
  Component Side w0.3: U2.1 73.66,74.858 76.195,77.394 v1(82.118,77.394) ; v1(82.093,74.701) 82.093,73.767 R10.2
  Solder Side w0.3: v1(82.093,74.701) 82.093,74.676 82.118,74.701 v1(82.118,77.394)
NetR11_2: R11.2 U2.2 | length 9.1
  Component Side w0.3: U2.2 76.534,72.39 77.199,71.725 79.306,71.725 79.911,71.12 80.391,71.12
  Component Side w0.4: 80.391,71.12 R11.2
NetR12_2: R12.2 U2.3 | length 9.7
  Component Side w0.3: U2.3 74.06,71.12 74.06,70.913 74.513,70.46 76.86,70.46 78.135,69.185 80.675,69.185 81.28,68.58 R12.2
NetR13_2: R13.2 U2.4 | length 10.1
  Component Side w0.3: U2.4 74.549,69.85 76.484,67.915 79.659,67.915 81.534,66.04 R13.2
NetR14_2: R14.2 U2.5 | length 11.7
  Component Side w0.3: U2.5 74.32,68.58 77.038,65.862 77.038,64.008 77.546,63.5 R14.2
NetR15_2: R15.2 U2.6 | length 13.2
  Component Side w0.3: U2.6 74.371,67.31 76.276,65.405 76.276,62.001 77.318,60.96 R15.2
NetR16_2: R16.2 U2.7 | length 14.1
  Component Side w0.3: U2.7 74.219,66.04 75.108,65.151 75.108,61.112 77.8,58.42 R16.2
NetR17_2: R17.2 U3.15 | length 97.2
  Component Side w0.3: R17.2 82.2,54.579 83.566,53.213 ; 129.083,95.25 U3.15
  Component Side w0.5: 83.566,53.213 100.965,53.213 101.6,53.848 101.6,98.044 102.921,99.365 124.968,99.365 129.083,95.25
NetR18_2: R18.2 U3.1 | length 4.7
  Component Side w0.3: R18.2 U3.1
NetR19_2: R19.2 U3.2 | length 5.3
  Component Side w0.3: R19.2 124.206,93.98 125.476,95.25 U3.2
NetR20_2: R20.2 U3.3 | length 5.8
  Component Side w0.3: R20.2 122.936,91.44 125.476,93.98 U3.3
NetR21_2: R21.2 U3.4 | length 6.3
  Component Side w0.3: R21.2 121.666,88.9 125.476,92.71 U3.4
NetR22_2: R22.2 U3.5 | length 7.7
  Component Side w0.3: R22.2 121.793,86.36 122.174,86.741 122.174,88.265 125.349,91.44 U3.5
NetR23_2: R23.2 U3.6 | length 9.1
  Component Side w0.3: R23.2 121.92,83.82 122.936,84.836 122.936,87.757 125.349,90.17 U3.6
NetR24_2: R24.2 U3.7 | length 10.2
  Component Side w0.3: R24.2 121.666,81.28 123.825,83.439 123.825,87.376 125.349,88.9 U3.7
NetR25_2: R25.2 U4.15 | length 10.9
  Component Side w0.3: R25.2 126.746,78.74 129.286,76.2 U4.15
NetR26_2: R26.2 U4.1 | length 5.3
  Component Side w0.3: R26.2 121.793,76.2 123.063,77.47 U4.1
NetR27_2: R27.2 U4.2 | length 5.8
  Component Side w0.3: R27.2 121.285,73.66 123.825,76.2 U4.2
NetR28_2: R28.2 U4.3 | length 7.1
  Component Side w0.3: R28.2 121.412,71.12 121.666,71.374 121.666,72.644 123.952,74.93 U4.3
NetR29_2: R29.2 U4.4 | length 8.5
  Component Side w0.3: R29.2 121.793,68.58 122.301,69.088 122.301,71.882 124.079,73.66 U4.4
NetR30_2: R30.2 U4.5 | length 9.9
  Component Side w0.3: R30.2 122.301,66.04 123.063,66.802 123.063,71.12 124.333,72.39 U4.5
NetR31_2: R31.2 U4.6 | length 10.6
  Component Side w0.3: R31.2 121.412,63.5 123.825,65.913 123.825,70.485 124.46,71.12 U4.6
NetR32_2: R32.2 U4.7 | length 11.2
  Component Side w0.3: R32.2 121.285,60.96 124.587,64.262 124.587,68.961 125.476,69.85 U4.7
NetR33_2: R33.2 U5.15 | length 5.4
  Component Side w0.3: R33.2 121.793,58.42 123.444,56.769 U5.15
NetR34_2: R34.2 U5.1 | length 13.6
  Component Side w0.3: R34.2 121,53.795 122.217,52.578 125.928,52.578 128.849,55.499 U5.1
NetU1_9: U1.9 U2.14 | length 17.2
  Component Side w0.3: U2.14 75.413,71.12 74.752,71.78 72.923,71.78 72.26,72.444 72.26,74.292 76.708,78.74 U1.9
NetU2_9: U2.9 U3.14 | length 98.6
  Component Side w0.3: U2.9@78.938,64.694 v1(80.645,64.694) ; v1(126.162,80.234) 127.457,81.529 127.457,91.897 129.54,93.98 U3.14
  Solder Side w0.3: v1(80.645,64.694) 80.645,57.429 85.496,52.578 122.707,52.578 126.162,56.032 v1(126.162,80.234)
NetU3_9: U3.9 U4.14 | length 14.5
  Component Side w0.3: U4.14 131.445,74.93 132.055,75.54 132.055,87.147 131.572,87.63 U3.9
NetU4_9: U4.9 U5.14 | length 14.7
  Component Side w0.3: U5.14 128.499,58.039 129.311,58.852 129.311,67.843 130.048,68.58 U4.9
SHCP: J1.4 U1.11 U2.11 U3.11 U4.11 U5.11 | length 134.5
  Component Side w0.3: U2.11 79.649,66.421 v1(79.883,66.421) ; U1.11 78.994,81.28 79.985,82.271 v1(80.035,82.271) ; U5.11 128.6,61.849 v1(128.626,61.874) ; v1(129.286,71.12) U4.11 131.978,71.12 132.944,72.085 132.944,89.256 132.029,90.17 U3.11
  Solder Side w0.3: v1(79.883,66.421) 79.063,66.421 78.257,65.615 ; v1(80.035,82.271) 79.985,82.271 78.257,80.543 78.257,65.615 ; J1.4@99.695,46.99 J1.4 99.06,49.149 98.171,50.038 ; v1@128.448,61.697 v1(128.626,61.874) ; v1(129.286,71.12) 128.626,70.46 v1(128.626,61.874) ; 78.257,65.615 78.257,55.905 84.125,50.038 98.171,50.038 ; 98.171,50.038 123.825,50.038 128.626,54.839 v1(128.626,61.874)
STCP: J1.3 U1.12 U2.12 U3.12 U4.12 U5.12 | length 132.3
  Component Side w0.3: U2.12 80.137,68.58 v1(80.899,67.818) ; U1.12 79.348,82.55 80.16,83.363 v1(80.95,83.363) ; v1(101.575,51.105) 101.575,47.015 J1.3 ; U5.12 125.908,60.757 v1(127.406,60.757) ; v1(128.397,72.263) 128.524,72.39 U4.12 ; v1(128.397,91.313) 130.703,91.313 U3.12
  Solder Side w0.3: v1(80.95,83.363) 80.899,83.312 v1(80.899,67.818) 80.899,66.345 79.375,64.821 79.375,56.591 84.861,51.105 v1(101.575,51.105) 101.575,51.13 123.088,51.13 127.406,55.448 v1(127.406,60.757) 127.406,71.272 v1(128.397,72.263) 128.397,78.232 127.635,78.994 127.635,82.55 128.397,83.312 v1(128.397,91.313)
VCC: C1.1 C2.1 C3.1 C4.1 C5.1 J1.1 U1.10 U1.16 U2.10 U2.16 U3.10 U3.16 U4.10 U4.16 U5.10 U5.16 | length 26.4
  Component Side w0.3: v1@77.216,89.789 77.47,90.043 C1.1@78.222,90.043 ; C2.1 C2.1@78.76,75.819 ; U2.16 C2.1@78.76,75.819 ; v1(79.629,76.454) 79.395,76.454 C2.1@78.76,75.819
  Component Side w0.4: v1(77.199,89.789) v1@77.216,89.789 ; v1(122.428,55.499) 122.628,55.299 C5.1 124.025,55.499 U5.16 ; v1(128.016,98.806) C3.1 129.085,97.61 130.175,96.52 U3.16 ; v1(128.626,80.083) C4.1 130.585,80.083 130.83,79.838 U4.16
  Component Side w0.5: v1(77.216,66.802) 77.754,66.802 78.516,66.04 U2.10 ; C1.1 78.422,87.968 U1.16 ; U1.10 v1(80.137,80.01) ; v1(124.638,62.662) 125.095,63.119 U5.10 ; U4.10 131.851,69.85 v1(131.902,69.901) ; U3.10 v1(132.004,88.9)
pads on no net: J2. J2.1 J2.2 J2.3 J2.4 J2.5 J2.6 J2.7 J2.8 J2.9 J2.10 J2.11 J2.12 J2.13 J2.14 J2.15 J2.16 J2.17 J2.18 J2.19 J2.20 J2.21 J2.22 J2.23 J2.24 J2.25 J2.26 J2.27 J2.28 J2.29 J2.30 J2.31 J2.32 J2.33 J2.34 U5.2 U5.3 U5.4 U5.5 U5.6 U5.7 U5.9

## Polygon pours and split planes (outlines as drawn)
GND on Ground Plane (split plane): 134.11,43.69 71.63,43.69 71.63,101.09 134.11,101.09
VCC on Power Plane (split plane): 134.11,43.69 71.63,43.69 71.63,101.09 134.11,101.09

## Silkscreen, mask and mechanical layers (free items; w line width, h text height)
Top Overlay:
  text "GND" at 97.028,49.149 h1 r90
  text "SHCP" at 99.632,49.149 h1 r90
  text "STCP" at 102.235,49.149 h1 r90
  text "DS" at 104.838,49.149 h1 r90
  text "VCC" at 107.442,49.149 h1 r90
  text "RetroBreadboard v1i1 MAKinteract Lab 2018" at 72.263,44.704 h1
Board:
  lines w0.5: 70.612,102.108 135.128,102.108 135.128,42.672 70.612,42.672 70.612,101.854 70.866,102.108